# Altium PCB instaspin_bldc_driver.PcbDoc
Units mm, origin at the board's own origin, x right, y up, seen from the top; angles counter-clockwise.
Board outline 50 x 35 mm, 2 copper layers (Top Layer, Bottom Layer), stack 1.571 mm thick; 107 components, 89 nets, 367 pads, 311 vias.
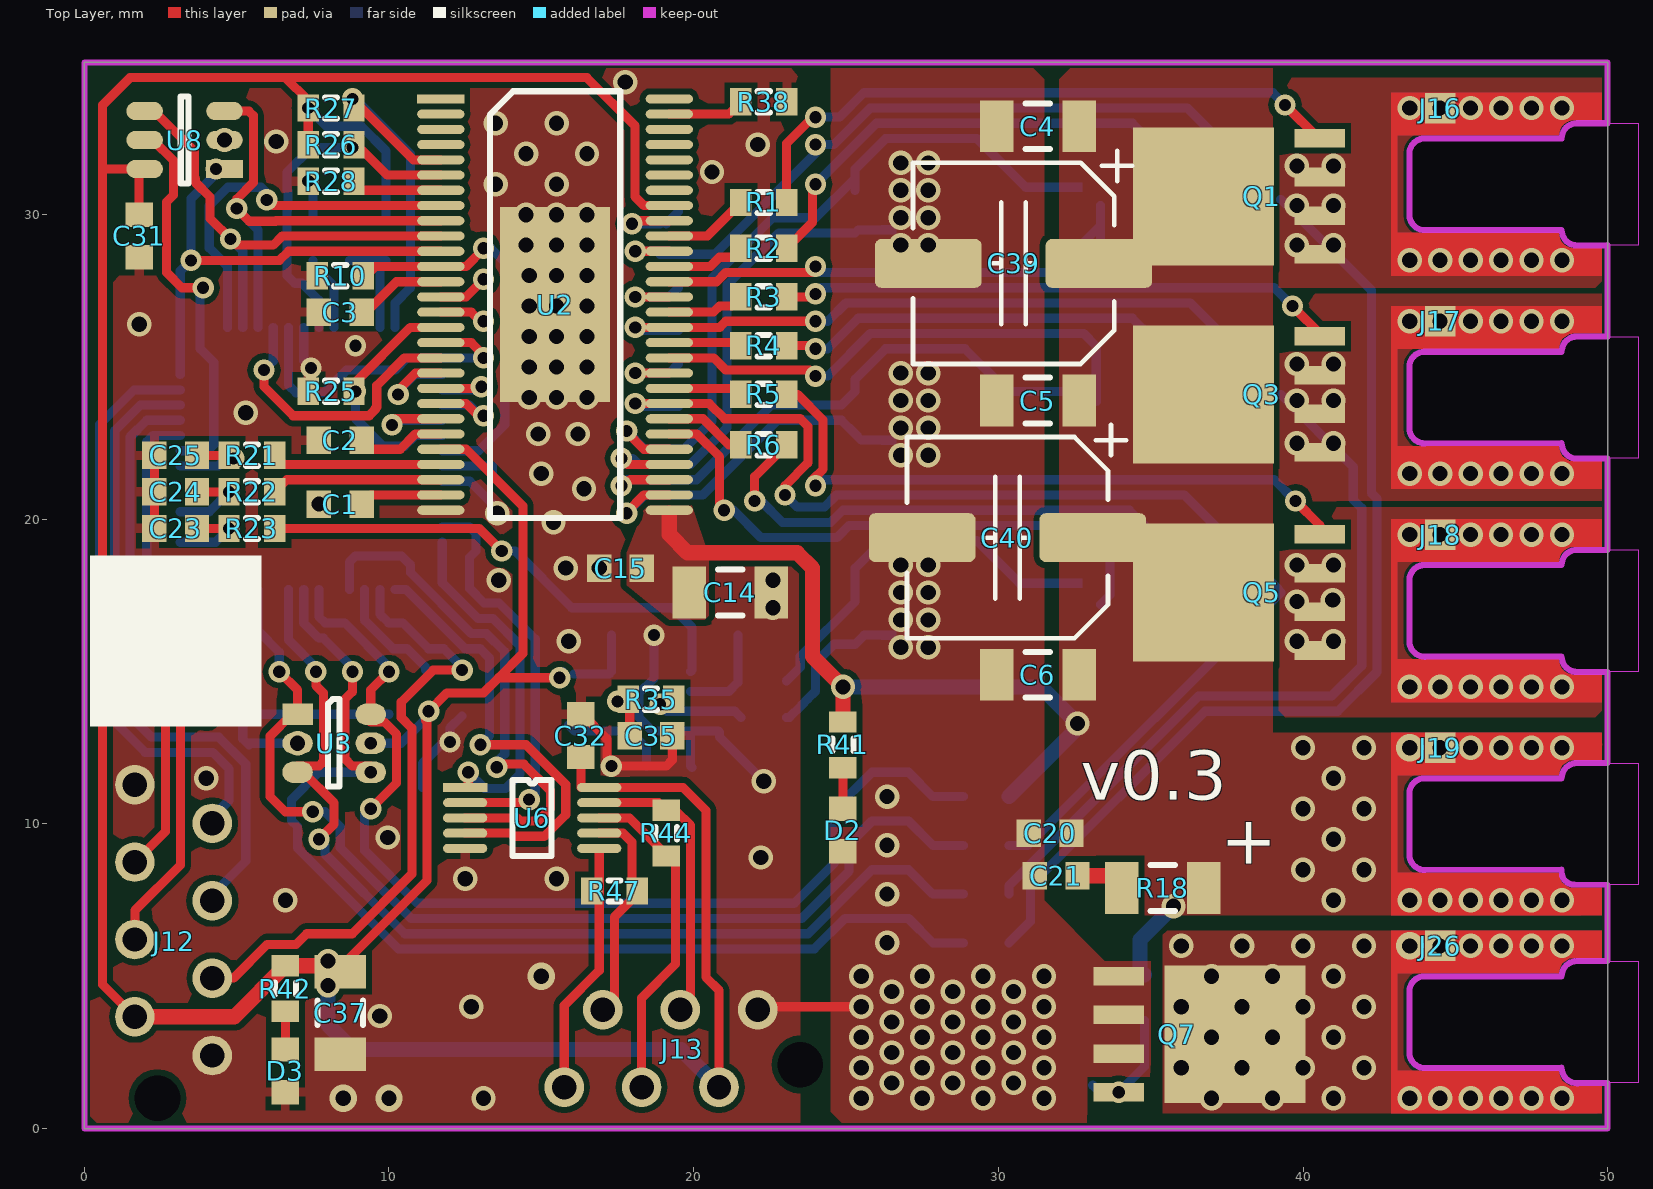
[diagram p0: Top Layer view]
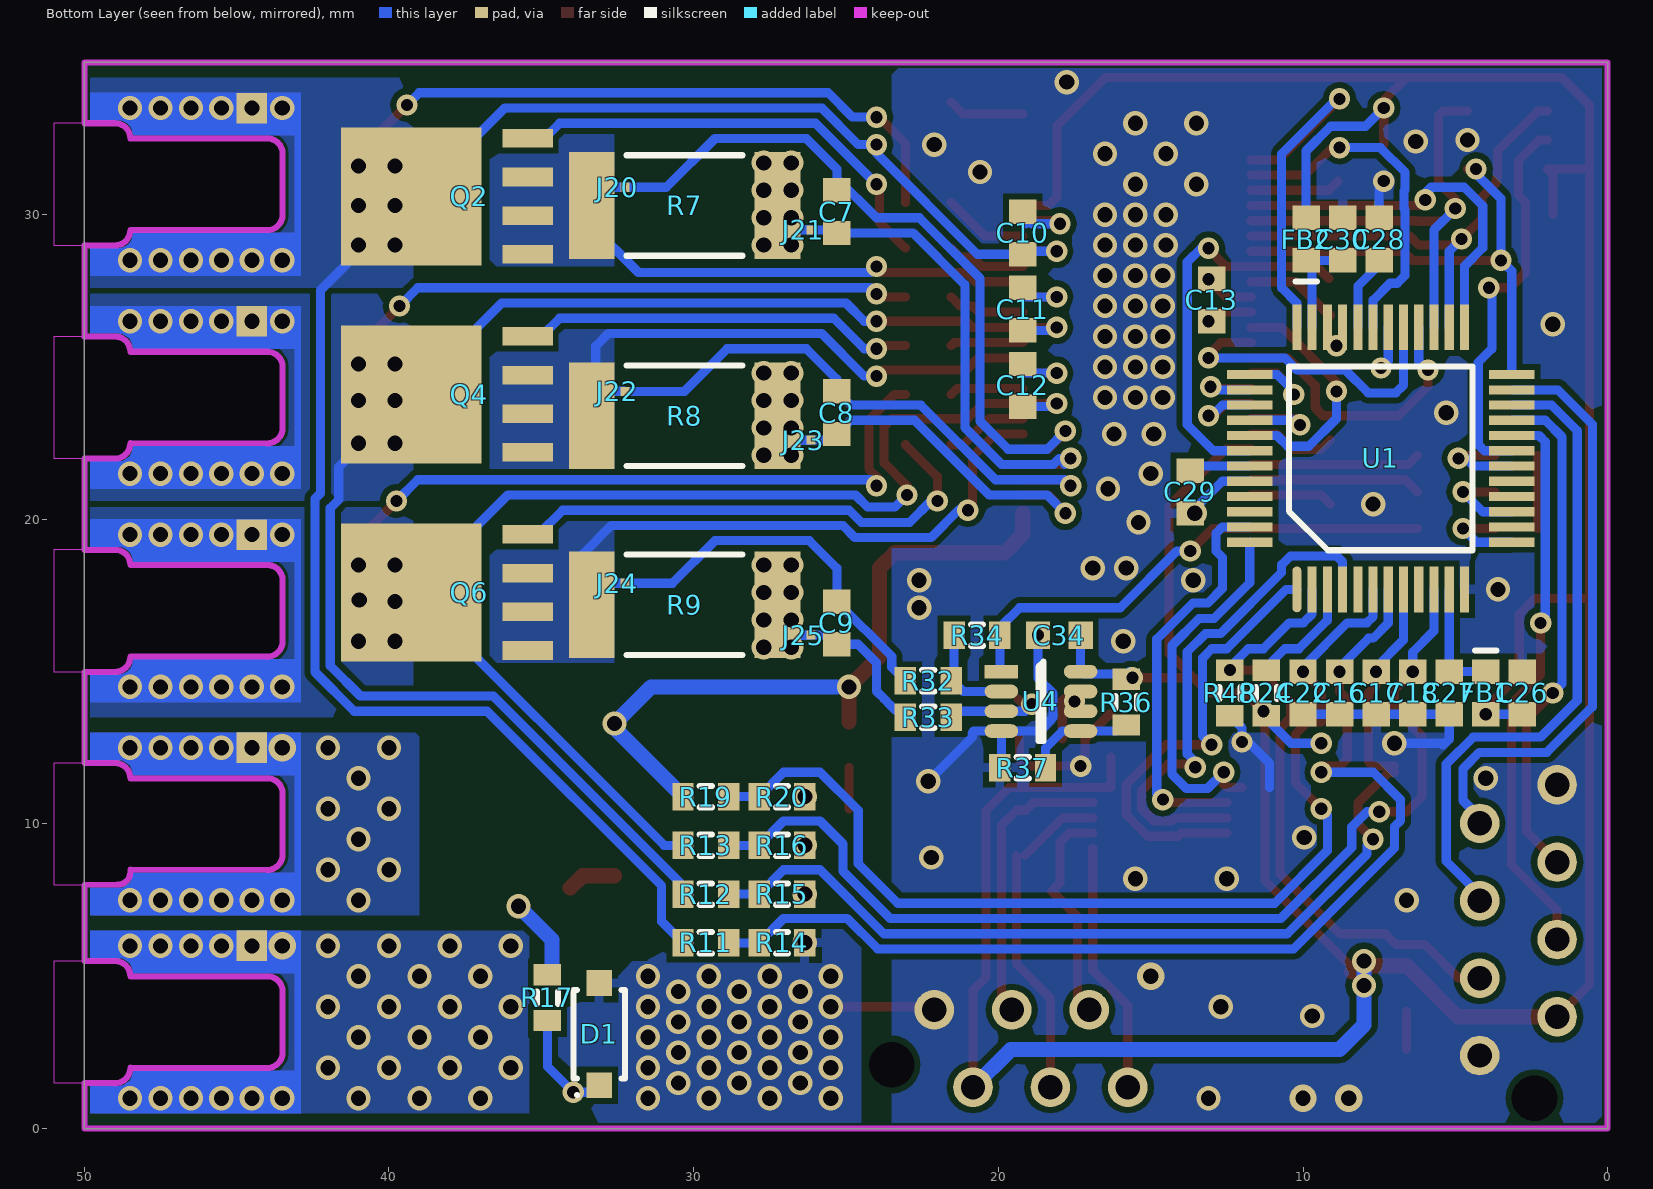
[diagram p1: Bottom Layer view, seen from below]

## Layer stack, top to bottom
Top Solder: solder mask 0.0102, Solder Resist, Dk 3.5
Top Layer: signal copper 0.0356
Dielectric 1: dielectric 1.5, FR-4, Dk 4.8
Bottom Layer: signal copper 0.0356
Bottom Solder: solder mask 0.0102, Solder Resist, Dk 3.5

## Board outline
0,0 50,0 50,35 0,35

## Design rules (kind name [scope] priority, off if disabled: settings)
Clearance ClearanceIgnore [HasFootprint('2MM-BANANA-SOCKET') vs OnLayer('Keep-Out Layer') OR HasFootprint('2MM-BANANA-SOCKET')] p1: gap=0
Clearance ClearanceKeepOut [All vs OnLayer('Keep-Out Layer')] p2: gap=0
Clearance [All] p3: gap=0.2
ComponentClearance ClearanceNone [HasFootprint('2MM-BANANA-SOCKET')] p1: gap=-1 collisioncheckmode=3 verticalgap=-1 showdistances=FALSE
ComponentClearance IgnoreClearance [InComponent('J15') vs OnLayer('Keep-Out Layer')] p2: gap=-1 collisioncheckmode=3 verticalgap=-1 showdistances=FALSE
ComponentClearance PowerPadClearance [HasFootprint('POWER-PAD')] p3: gap=0 collisioncheckmode=3 verticalgap=0 showdistances=FALSE
ComponentClearance NetTieClearance [HasFootprint('Net-Tie-0803')] p4: gap=0 collisioncheckmode=3 verticalgap=0 showdistances=FALSE
ComponentClearance [All] p5: gap=0.2 collisioncheckmode=3 verticalgap=0.2 showdistances=FALSE
DiffPairsRouting [All] p1: maxlimit=0.5 minlimit=0.2 mostfreqgap=0.2 toplayer_minwidth=0.2 toplayer_maxwidth=2 toplayer_prefwidth=0.3 bottomlayer_minwidth=0.2 bottomlayer_maxwidth=2 bottomlayer_prefwidth=0.3 maxuncoupledlength=10
MinimumSolderMaskSliver [All] p1: minsoldermaskwidth=0
PolygonConnect DirectConnectComponents [All vs IsVia or InComponent('U2') or InComponent('C37') or InComponent('C15') or InComponent('C14') or InComponent('J12') or InComponent('J13') or InComponent('Q7')] p1: connectstyle=Direct reliefconductorwidth=0.254 reliefentries=4 polygonreliefangle="90 Angle" airgapwidth=0.254
PolygonConnect DirectConnectPolygons [All vs IsNamedPolygon('Power 16V') or IsNamedPolygon('Power GND') or IsNamedPolygon('Driver 16V') or InNet('SL_A') or InNet('SL_B') or InNet('SL_C') or InNet('SH_A') or InNet('SH_B') or InNet('SH_C') or InNet('BAT_GND') or InNet('16V')] p2: connectstyle=Direct reliefconductorwidth=0.254 reliefentries=4 polygonreliefangle="90 Angle" airgapwidth=0.254
PolygonConnect [All] p3: connectstyle=Relief reliefconductorwidth=0.3 reliefentries=4 polygonreliefangle="90 Angle" airgapwidth=0.2
RoomDefinition instaspin_bldc_driver [InComponentClass('instaspin_bldc_driver')] p1: confinementstyle=ConfineIn formatcopy=TRUE lockcomponents=FALSE outline 0.012,-0.03 86.4,-0.03 86.4,50 0.012,50
RoutingVias [All] p1: holewidth=0.4 width=0.7 viastyle="Through Hole" minholewidth=0.3 minwidth=0.5 maxholewidth=5 maxwidth=3
ShortCircuit ShortCircuitAllow [HasFootprint('2MM-BANANA-SOCKET')] p1: allowed=TRUE
ShortCircuit [All] p2: allowed=FALSE
SilkToSilkClearance [All] p1: silktosilkclearance=0
SilkToSolderMaskClearance [IsPad] p1: minsilkscreentomaskgap=0 clearancetoexposedcopper=TRUE
SolderMaskExpansion SolderMaskExpansionTentedVia [IsVia And (Not IsTestpoint)] p1: expansion=-5
SolderMaskExpansion [All] p2: expansion=0.1
Width [All] p1: maxlimit=10 minlimit=0.2 preferedwidth=0.3
24 further rules are at their usual default settings.

## Classes and differential pairs
differential pair C_ISENSE: +C_ISENSE_P -C_ISENSE_N
differential pair B_ISENSE: +B_ISENSE_P -B_ISENSE_N
differential pair A_ISENSE: +A_ISENSE_P -A_ISENSE_N

## Components (designator, comment, footprint, x,y, rotation, side; value= is the part's Value field where it differs from the comment)
C1 "1uF" 1608[0603] 8.4,20.5 r0 top
C2 "1uF" 1608[0603] 8.4,22.6 r0 top
C3 "2.2uF" 1608[0603] 8.4,26.8 r0 top
C4 "2.2uF" C1206 31.3,32.9 r180 top
C5 "2.2uF" C1206 31.3,23.9 r180 top
C6 "2.2uF" C1206 31.3,14.9 r180 top
C7 "1nF" 1608[0603] 25.3,30.1 r90 bottom
C8 "1nF" 1608[0603] 25.3,23.5 r90 bottom
C9 "1nF" 1608[0603] 25.3,16.6 r90 bottom
C10 "100nF" 1608[0603] 19.2,29.4 r90 bottom
C11 "100nF" 1608[0603] 19.2,26.9 r90 bottom
C12 "100nF" 1608[0603] 19.2,24.4 r90 bottom
C13 "22nF" 1608[0603] 13,27.2 r270 bottom
C14 "2.2uF" C1206 21.2,17.6 r180 top
C15 "100nF" 1608[0603] 17.6,18.4 r180 top
C16 "100nF" 1608[0603] 8.8,14.3 r90 bottom
C17 "100nF" 1608[0603] 7.6,14.3 r90 bottom
C18 "100nF" 1608[0603] 6.4,14.3 r90 bottom
C20 "100nF" 1608[0603] 31.7,9.7 r0 top
C21 "10nF" 1608[0603] 31.9,8.3 r0 top
C22 "100nF" 1608[0603] 10,14.3 r90 bottom
C23 "2.2nF" 1608[0603] 3,19.7 r0 top
C24 "2.2nF" 1608[0603] 3,20.9 r0 top
C25 "2.2nF" 1608[0603] 3,22.1 r0 top
C26 "2.2uF" 1608[0603] 2.8,14.3 r270 bottom
C27 "2.2uF" 1608[0603] 5.2,14.3 r90 bottom
C28 "2.2uF" 1608[0603] 7.5,29.2 r270 bottom
C29 "2.2uF" 1608[0603] 13.7,20.9 r90 bottom
C30 "2.2uF" 1608[0603] 8.7,29.2 r270 bottom
C31 "100nF" 1608[0603] 1.8,29.3 r270 top
C32 "100nF" 1608[0603] 16.3,12.9 r90 top
C34 "100nF" 1608[0603] 18,16.2 r180 bottom
C35 "2.2uF" 1608[0603] 18.6,12.9 r180 top
C37 "10uF" C1206 8.4,3.8 r90 top
C39 "220µ" CAP_ELEC_6.3x4.2 30.5,28.4 r0 top
C40 "220µ" CAP_ELEC_6.3x4.2 30.3,19.4 r0 top
D1 "ZENER" SODFL370X135-2N 33.1,3.1 r90 bottom
D2 "LED1" 1608[0603] 24.9,9.8 r270 top
D3 "LED1" 1608[0603] 6.6,1.9 r270 top
FB1 "220 OHM" INDC1608L 4,14.3 r270 bottom
FB2 "60 OHM" INDC1608L 9.9,29.2 r90 bottom
J12 "JTAG" MICRO-MATCH-8 4.2,2.4 r270 top
J13 "RS485" MICRO-MATCH-6 22.1,3.9 r0 top
J16 "HEADER-1" 2MM-BANANA-SOCKET 50.5,31 r0 top
J17 "HEADER-1" 2MM-BANANA-SOCKET 50.5,24 r0 top
J18 "HEADER-1" 2MM-BANANA-SOCKET 50.5,17 r0 top
J19 "HEADER-1" 2MM-BANANA-SOCKET 50.5,10 r0 top
J20 "Net-Tie" NET-TIE-0803 32.5,30.9 r0 bottom net-tie
J21 "Net-Tie" NET-TIE-0803 26.4,29.5 r0 bottom net-tie
J22 "Net-Tie" NET-TIE-0803 32.5,24.2 r0 bottom net-tie
J23 "Net-Tie" NET-TIE-0803 26.4,22.6 r0 bottom net-tie
J24 "Net-Tie" NET-TIE-0803 32.5,17.9 r0 bottom net-tie
J25 "Net-Tie" NET-TIE-0803 26.4,16.2 r0 bottom net-tie
J26 "HEADER-1" 2MM-BANANA-SOCKET 50.5,3.5 r0 top
Q1 "MOSFET-N" SOT669 37.9,30.6 r180 top
Q2 "MOSFET-N" SOT669 38.1,30.6 r0 bottom
Q3 "MOSFET-N" SOT669 37.9,24.1 r180 top
Q4 "MOSFET-N" SOT669 38.1,24.1 r0 bottom
Q5 "MOSFET-N" SOT669 37.9,17.6 r180 top
Q6 "MOSFET-N" SOT669 38.1,17.6 r0 bottom
Q7 "MOSFET-N" SOT669 36.6,3.1 r0 top
R1 "10R" J1-0603 22.3,30.4 r0 top
R2 "10R" J1-0603 22.3,28.9 r0 top
R3 "10R" J1-0603 22.3,27.3 r0 top
R4 "10R" J1-0603 22.3,25.7 r0 top
R5 "10R" J1-0603 22.3,24.1 r0 top
R6 "10R" J1-0603 22.3,22.45 r0 top
R7 "10m" 2512M 30.3,30.3 r0 bottom
R8 "10m" 2512M 30.3,23.4 r0 bottom
R9 "10m" 2512M 30.3,17.2 r0 bottom
R10 "1k" J1-0603 8.4,28 r0 top
R11 "34.8k" J1-0603 29.6,6.1 r0 bottom
R12 "34.8k" J1-0603 29.6,7.7 r0 bottom
R13 "34.8k" J1-0603 29.6,9.3 r0 bottom
R14 "4.99k" J1-0603 27.1,6.1 r0 bottom
R15 "4.99k" J1-0603 27.1,7.7 r0 bottom
R16 "4.99k" J1-0603 27.1,9.3 r0 bottom
R17 "100k" J1-0603 34.8,4.3 r90 bottom
R18 "3.3R" C1206 35.4,7.9 r0 top
R19 "34.8k" J1-0603 29.6,10.9 r0 bottom
R20 "4.99k" J1-0603 27.1,10.9 r0 bottom
R21 "56R" J1-0603 5.5,22.1 r0 top
R22 "56R" J1-0603 5.5,20.9 r0 top
R23 "56R" J1-0603 5.5,19.7 r0 top
R24 "2.2k" J1-0603 11.2,14.3 r90 bottom
R25 "1k" J1-0603 8.1,24.2 r0 top
R26 "10k" J1-0603 8.1,32.3 r180 top
R27 "10k" J1-0603 8.1,33.5 r180 top
R28 "1R" J1-0603 8.1,31.1 r0 top
R32 "1.00k" J1-0603 22.3,14.7 r0 bottom
R33 "1.00k" J1-0603 22.3,13.5 r0 bottom
R34 "10.0k" J1-0603 20.7,16.2 r0 bottom
R35 "10k" J1-0603 18.6,14.1 r180 top
R36 "10.0k" J1-0603 15.8,14 r90 bottom
R37 "10.0k" J1-0603 19.2,11.85 r180 bottom
R38 "10k" J1-0603 22.3,33.7 r180 top
R41 "4.7k" J1-0603 24.9,12.6 r270 top
R42 "330R" J1-0603 6.6,4.6 r270 top
R44 "120R" J1-0603 19.1,9.7 r270 top
R47 "120R" J1-0603 17.4,7.8 r180 top
R48 "2.2k" J1-0603 12.4,14.3 r270 bottom
U1 "TMS320F28027F" PQFP48 10.2,17.7 r90 bottom
U2 "DRV8301" SO56_POWERPAD 11.7,33.8 r0 top
U3 "NUP4201MR6" TSOP-6 7,13.6 r0 top
U4 "OPA2374" SOT23-8 19.9,15 r180 bottom
U6 "SN65HVD73" SOP10 12.5,11.2 r0 top
U8 "25AA010" TSOT-23-6 4.6,31.5 r180 top

## Footprints (in the part's own frame and the unit in brackets; to place one, negate y for a bottom-side part, rotate by r counter-clockwise, add the part's x,y. Pads: shape width x height; smd on the part's side, far side on the other; paste and mask are expansions set on the pad)
2MM-BANANA-SOCKET [mm]
  rect 1x1 all layers, no hole: 1(-6,2.5)
  Keep-Out Layer board cut-out: 0.5,2 0.5,-2 -1.5,-2 -1.691,-1.962 -1.854,-1.854 -1.962,-1.691 -2,-1.5 -2,-1.5 -6.5,-1.5 -6.691,-1.462 -6.854,-1.354 -6.962,-1.191 -7,-1 -7,-1 -7,1 -6.962,1.191 -6.854,1.354 -6.691,1.462 -6.5,1.5 -6.5,1.5 -2,1.5 -1.962,1.691 -1.854,1.854 -1.691,1.962 -1.5,2 -1.5,2
  Multi-Layer region: -7,3 -7,1.7 -7.4,1.7 -7.4,-1.7 -7,-1.7 -7,-3 -7.6,-3 -7.6,3
  Multi-Layer region: -7.6,-1.6 -7.6,-3 -0.7,-3 -0.7,-2.1 -1.6,-2.1 -1.85,-2.033 -2.033,-1.85 -2.1,-1.6 -2.1,-1.6
  Multi-Layer region: -7.6,1.6 -7.6,3 -0.7,3 -0.7,2.1 -1.6,2.1 -1.85,2.033 -2.033,1.85 -2.1,1.6 -2.1,1.6
  body extent -6,-2 0,2, height 2
1608[0603] [mm] "Chip Capacitor, Body 1.6x0.8mm, IPC High Density"
  rect 0.8x0.9 smd: 1(-0.7,0) 2(0.7,0)
  body extent -0.87,-0.48 0.87,0.48, height 1.3
2512M [mm]
  rect 1.5x3.5 smd: 1(-3.05,0) 2(3.05,0)
  silkscreen extent -1.9,-1.65 1.9,1.65, body extent -3.22,-1.67 3.22,1.67, height 0.71
C1206 [mm] "Chip Capacitor, Body 3.2x1.6mm, IPC High Density"
  rect 1.1x1.7 smd: 1(-1.35,0) 2(1.35,0)
  silkscreen extent -0.4,-0.75 0.4,0.75, body extent -1.7,-0.9 1.7,0.9, height 1.3
CAP_ELEC_6.3x4.2 [mm] "Capacitor, polarized, aluminum can; 6.3x4.2mm DxH"
  round 0.508 on Mech15: 0(0,0)
  rrect25% 3.5x1.6 smd: 1(2.8,0) 2(-2.8,0)
  silkscreen extent -3.3,-3.3 3.9,3.7, body extent -3.3,-3.3 3.3,3.3, height 4.23
INDC1608L [mm] "Chip Inductor, Body 1.6x0.8mm, IPC High Density"
  rect 0.8x0.9 smd: 1(-0.7,0) 2(0.7,0)
  silkscreen extent -1.4,-0.35 -1.4,0.35, body extent -0.87,-0.48 0.87,0.48, height 0.55
J1-0603 [mm] "Chip Resistor, Body 1.6x0.8mm, IPC High Density"
  rect 0.7x0.9 smd: 1(-0.75,0) 2(0.75,0)
  silkscreen extent -0.2,-0.35 0.2,0.35, body extent -0.85,-0.48 0.85,0.48, height 0.9
MICRO-MATCH-6 [mm]
  round 1.3 hole 0.8: 1(0,0) 2(-1.27,-2.54) 3(-2.54,0) 4(-3.81,-2.54) 5(-5.08,0) 6(-6.35,-2.54)
  round 0 hole 1.5 unplated: drill(1.4,-1.8)
  body extent -7.95,-3.77 1.6,1.23, height 4
MICRO-MATCH-8 [mm]
  round 1.3 hole 0.8: 1(0,0) 2(-1.27,-2.54) 3(-2.54,0) 4(-3.81,-2.54) 5(-5.08,0) 6(-6.35,-2.54) 7(-7.62,0) 8(-8.89,-2.54)
  round 0 hole 1.5 unplated: drill(1.4,-1.8)
  body extent -10.49,-3.77 1.6,1.23, height 4
NET-TIE-0803 [mm]
  rect 0.3x0.3 smd paste-0.15 mask-0.15: 1(-0.25,0) 2(0.25,0)
  Top Layer region: -0.25,-0.15 -0.25,0.15 0.25,0.15 0.25,-0.15
PQFP48 [mm]
  oval 1.5x0.3 smd: 1(0,0)
  rect 1.5x0.3 smd: 2(0,-0.5) 3(0,-1) 4(0,-1.5) 5(0,-2) 6(0,-2.5) 7(0,-3) 8(0,-3.5) 9(0,-4) 10(0,-4.5) 11(0,-5) 12(0,-5.5) 25(8.6,-5.5) 26(8.6,-5) 27(8.6,-4.5) 28(8.6,-4) 29(8.6,-3.5) 30(8.6,-3) 31(8.6,-2.5) 32(8.6,-2) 33(8.6,-1.5) 34(8.6,-1) 35(8.6,-0.5) 36(8.6,0)
  rect 0.3x1.5 smd: 13(1.55,-7.05) 14(2.05,-7.05) 15(2.55,-7.05) 16(3.05,-7.05) 17(3.55,-7.05) 18(4.05,-7.05) 19(4.55,-7.05) 20(5.05,-7.05) 21(5.55,-7.05) 22(6.05,-7.05) 23(6.55,-7.05) 24(7.05,-7.05) 37(7.05,1.55) 38(6.55,1.55) 39(6.05,1.55) 40(5.55,1.55) 41(5.05,1.55) 42(4.55,1.55) 43(4.05,1.55) 44(3.55,1.55) 45(3.05,1.55) 46(2.55,1.55) 47(2.05,1.55) 48(1.55,1.55)
  silkscreen extent 1.28,-5.76 7.31,0.27, body extent -0.27,-7.33 8.87,1.82, height 1.62
SO56_POWERPAD [mm]
  rect 1.55x0.3 smd: 1(0,0)
  oval 1.55x0.3 smd: 2(0,-0.5) 3(0,-1) 4(0,-1.5) 5(0,-2) 6(0,-2.5) 7(0,-3) 8(0,-3.5) 9(0,-4) 10(0,-4.5) 11(0,-5) 12(0,-5.5) 13(0,-6) 14(0,-6.5) 15(0,-7) 16(0,-7.5) 17(0,-8) 18(0,-8.5) 19(0,-9) 20(0,-9.5) 21(0,-10) 22(0,-10.5) 23(0,-11) 24(0,-11.5) 25(0,-12) 26(0,-12.5) 27(0,-13) 28(0,-13.5) 29(7.5,-13.5) 30(7.5,-13) 31(7.5,-12.5) 32(7.5,-12) 33(7.5,-11.5) 34(7.5,-11) 35(7.5,-10.5) 36(7.5,-10) 37(7.5,-9.5) 38(7.5,-9) 39(7.5,-8.5) 40(7.5,-8) 41(7.5,-7.5) 42(7.5,-7) 43(7.5,-6.5) 44(7.5,-6) 45(7.5,-5.5) 46(7.5,-5) 47(7.5,-4.5) 48(7.5,-4) 49(7.5,-3.5) 50(7.5,-3) 51(7.5,-2.5) 52(7.5,-2) 53(7.5,-1.5) 54(7.5,-1) 55(7.5,-0.5) 56(7.5,0)
  rect 3.6x6.4 smd: 57(3.75,-6.75)
  silkscreen extent 1.61,-13.75 5.89,0.25
SODFL370X135-2N [mm] "SODFL, 2-Leads, Body 1,55x3,70mm, IPC Medium Density"
  rect 0.85x0.85 smd: 1(-1.675,0) 2(1.675,0)
  silkscreen extent -2.05,-0.85 1.45,0.85, body extent -1.43,-0.85 1.42,0.85, height 1.35
SOP10 [mm]
  rect 1.45x0.3 smd: 1(0,0)
  oval 1.45x0.3 smd: 2(0,-0.5) 3(0,-1) 4(0,-1.5) 5(0,-2) 6(4.4,-2) 7(4.4,-1.5) 8(4.4,-1) 9(4.4,-0.5) 10(4.4,0)
  silkscreen extent 1.56,-2.25 2.84,0.25, body extent -0.27,-2.5 4.63,0.5, height 1.15
SOT23-8 [mm]
  rect 1.1x0.45 smd: 1(0,0)
  oval 1.1x0.45 smd: 2(0,-0.65) 3(0,-1.3) 4(0,-1.95) 5(2.6,-1.95) 6(2.6,-1.3) 7(2.6,-0.65) 8(2.6,0)
  silkscreen extent 1.22,-2.28 1.38,0.33, body extent -0.08,-2.47 2.72,0.47, height 1.2
SOT669 [mil]
  rect 182x178 smd: D(46,0)
  rect 65x24 smd: G(-104.33,-75) S(-104.33,75) S(-104.33,-25) S(-104.33,25)
  body extent -125,-99 135,97, height 43
TSOP-6 [mm]
  rect 1x0.7 smd: 1(0,0)
  oval 1x0.7 smd: 2(0,-0.95) 3(0,-1.9) 4(2.4,-1.9) 5(2.4,-0.95) 6(2.4,0)
  silkscreen extent 1,-2.38 1.38,0.5, body extent -0.12,-2.45 2.58,0.55, height 1
TSOT-23-6 [mm]
  rect 1.2x0.6 smd: 1(0,0)
  oval 1.2x0.6 smd: 2(0,-0.95) 3(0,-1.9) 4(2.62,-1.9) 5(2.62,-0.95) 6(2.62,0)
  silkscreen extent 1.19,-2.38 1.43,0.48, body extent -0.07,-2.4 2.73,0.5, height 1.45

## Part data
C1 C2 C3 C4 C5 C6 C7 C8 C9 C10 C11 C12 C13 C14 C15 C16 C17 C18 C20 C21 C22 C23 C24 C25 C26 C27 C28 C29 C30 C31 C32 C34 C35 C37: library part "Cap Semi", "Capacitor (Semiconductor SIM Model)"
C39 C40: library part CAPE_470u_16V_THT, "Capacitor THT Alum Elec 470uF 20% 16V"
D1: library part ZENER-DIODE
D2 D3: "Typical RED GaAs LED"
FB1 FB2: library part Inductor, "Ferrite"
J12: library part HEADER-8
J13: library part HEADER-6
R1 R2 R3 R4 R5 R6 R7 R8 R9 R10 R11 R12 R13 R14 R15 R16 R17 R18 R19 R20 R21 R22 R23 R24 R25 R26 R27 R28 R32 R33 R34 R35 R36 R37 R38 R41 R42 R44 R47 R48: library part Res3, "Resistor"
U6: library part SN65HVD3086E
U8: "EEPROM"

## Via types
v1: diameter 0.8, hole 0.5, Top Layer to Bottom Layer, 228 vias
v2: diameter 0.7, hole 0.4, Top Layer to Bottom Layer, 76 vias
v3: diameter 0.9, hole 0.5, Top Layer to Bottom Layer, 7 vias

## Nets (pads, with @x,y where several pads share a name; then routed paths per layer and width w, separated by ;. In a path a pad name is that pad's centre, name@x,y a point inside that pad or via, vN(x,y) a via of type N, cw(c..) or ccw(c..) an arc to the next point about the centre after c; other vN are vias at no path point)
3.3V: C26.2 C31.1 C32.1 C34.2 C37.2 FB1.2 FB2.2 J12.2 J13.2 R24.1 R26.2 R27.2 R36.2 R42.1 U2.24 U2.49 U3.5 U4.8 U6.10 U8.6 | length 138.1
  Top Layer w0.3: 0.7,31.5 U8.6 1.8,31.32 C31.1 ; J12.2 0.6,4.73 0.6,17.4 ; v2(4,13.6) 4,13.807 2.9,14.907 2.9,16.89 2.39,17.4 0.6,17.4 ; R26.2 R27.2@7.35,33.3 ; R27.2@7.55,33.3 v2(7.35,33.5) 7.35,33.75 6.6,34.5 ; C37.2 8.4,5.3 11.25,8.15 11.25,13.354 11.2,13.404 v2@11.2,13.55 ; v2(11.3,13.7) 11.9,14.3 13.1,14.3 13.6,14.8 ; U2.24 12.532,22.3 14.4,20.432 14.4,15.6 13.6,14.8 ; v2(15.6,14.8) 13.6,14.8 ; C32.1 16.3,11.504 16.3,11.2 U6.10 17.9,11.2 19.645,11.2 20.4,10.445 20.4,4.974 20.83,4.544 J13.2 ; U2.49 18.368,30.3 18.268,30.4 18.075,30.593 18.075,32.92 16.495,34.5 6.6,34.5 ; 0.6,17.4 0.6,33.6 1.5,34.5 6.6,34.5
  Top Layer w0.5: J12.2 4.92,3.67 R42.1 8.2,5.35 C37.2 8.05,5.5 v1(8,5.5)
  Bottom Layer w0.3: C26.2 v2(4,13.6) ; v2(7.35,33.5) 7.95,32.9 8.5,32.9 8.505,32.895 8.51,32.9 9.09,32.9 9.9,32.09 FB2.2 ; v2(9.4,12.65) 10.395,12.65 11.3,13.555 v2(11.3,13.7) ; v2(15.6,14.8) 15.6,14.9 R36.2@15.7,15 ; R36.2@16.075,14.925 17.225,14.925 U4.8 C34.2
  Bottom Layer w0.5: v1(8,5.5) 8,3.4 8.8,2.6 19.59,2.6 J13.2
  other v1: 8,4.7
16V: C4.1 C5.1 C6.1 C14.2 C15.1 C20.2 C39.1 C40.1 J19.1 Q1.D Q3.D Q5.D R17.2 R18.2 R19.2 R41.1 U2.29 | length 25.2
  Top Layer w0.5: U2.29@19.2,20.2 19.2,19.5 19.8,18.9 23.4,18.9 23.9,18.4 23.9,15.5 v1(24.9,14.5) R41.1
  Bottom Layer w0.5: v1@25.3,14.5 31.4,14.5 v1(32.6,13.3) 32.6,13.15 R19.2 ; R17.2 34.65,5.2 34.65,6.2 v1(35.75,7.3)
  other v1: 41,7.5 43.5,7.5 44.5,7.5 45.5,7.5 46.5,7.5 47.5,7.5 48.5,7.5 40,8.5 42,8.5 41,9.5 40,10.5 42,10.5 41,11.5 40,12.5 42,12.5 45.5,12.5 46.5,12.5 47.5,12.5 48.5,12.5
  other v3: 43.5,12.5 44.5,12.5
A: J13.3 R44.1 U6.9 | length 9.5
  Top Layer w0.3: U6.9 18.85,10.7 R44.1 19.4,10.45 19.9,9.95 19.9,4.24 J13.3
A_ISENSE_N: C7.1 J21.1 U2.32 | length 16.5
  Top Layer w0.3: v2(17.627,22) 17.827,21.8 U2.32
  Bottom Layer w0.3: v2@17.827,21.8 v2(17.627,22) 17.993,22 18.193,21.8 19.886,21.8 21.1,23.014 21.1,27.7 22.8,29.4 C7.1 25.4,29.5 J21.1
A_ISENSE_P: C7.2 J20.1 U2.33 | length 24.6
  Top Layer w0.3: v2(17.8,22.9) 17.8,22.868 18.368,22.3 U2.33
  Bottom Layer w0.3: v2(17.8,22.9) 18.4,22.3 19.679,22.3 20.6,23.221 20.6,27.907 22.593,29.9 24,29.9 C7.2@25.3,31.2 ; C7.2 25.3,31.5 26.3,32.5 29.3,32.5 30.9,30.9 J20.1
ADCINB1: C23.2 R23.1 U1.13 | length 2.8
  Top Layer w0.3: C23.2 v2(4.75,19.7)
  Bottom Layer w0.3: U1.13 4.3,19.25 v2(4.75,19.7)
ADCINB3: C24.2 R22.1 U1.15 | length 2.9
  Top Layer w0.3: C24.2 v2(4.75,20.9)
  Bottom Layer w0.3: U1.15 4.1,20.25 v2(4.75,20.9)
ADCINB7: C25.2 R21.1 U1.18 | length 2.9
  Top Layer w0.3: C25.2 R21.1
  Bottom Layer w0.3: U1.18 4.4,21.75 4.65,22 v2(4.9,22)
B: J13.4 R44.2 U6.8 | length 10.8
  Top Layer w0.3: U6.8 17.889,10.2 R44.2@19.12,8.97 ; J13.4 18.29,4.29 19.4,5.4 R44.2@19.4,8.95
B_ISENSE_N: C8.1 J23.1 U2.30 | length 11.5
  Top Layer w0.3: v2(17.8,20.2) 17.8,20.232 18.368,20.8 U2.30
  Bottom Layer w0.3: v2(17.8,20.2) 18.4,20.8 20.3,20.8 22.75,23.25 24.85,23.25 C8.1 25.5,22.6 J23.1
B_ISENSE_P: C8.2 J22.1 U2.31 | length 18.6
  Top Layer w0.3: 17.917,21.3 U2.31
  Bottom Layer w0.3: v2(17.627,21.1) 17.827,21.3 20.093,21.3 22.543,23.75 24.85,23.75 C8.2 25.3,24.6 26.3,25.6 28.9,25.6 30.3,24.2 J22.1
BAT_GND: J26.1 Q7.D
  other v1: 37,1 39,1 41,1 43.5,1 44.5,1 45.5,1 46.5,1 47.5,1 48.5,1 36,2 38,2 40,2 42,2 37,3 39,3 41,3 36,4 38,4 40,4 42,4 37,5 39,5 41,5 36,6 38,6 40,6 42,6 45.5,6 46.5,6 47.5,6 48.5,6
  other v3: 43.5,6 44.5,6
C_ISENSE_N: C9.1 J25.1 R33.2 | length 4.8
  Bottom Layer w0.3: R33.2 23.143,13.5 23.543,13.9 23.545,13.9 23.75,14.105 23.75,14.107 24,14.357 24,15.293 24.607,15.9 C9.1 25.6,16.2 J25.1
C_ISENSE_P: C9.2 J24.1 R32.2 | length 12.5
  Bottom Layer w0.3: R32.2 23.5,15.15 23.5,15.5 C9.2 25.3,18.4 26.2,19.3 29.3,19.3 30.7,17.9 J24.1
DC_CAL: R10.2 U1.42 U2.12 | length 13
  Top Layer w0.3: R10.2@9.15,27.9 9.55,28.3 U2.12 12.532,28.3 13.1,28.868 v2(13.1,28.9)
  Bottom Layer w0.3: U1.42 12.94,22.25 13.8,23.11 13.8,23.4 13.8,28.445 13.345,28.9 v2(13.1,28.9)
DC_V_FB: C22.2 R19.1 R20.2 U1.6 U3.6 | length 34.5
  Top Layer w0.3: v2(9.4,10.5) 10.25,11.35 10.25,12.94 9.84,13.35 9.4,13.35 U3.6 ; U3.6@9.4,13.8 9.4,14.4 v2(10,15)
  Bottom Layer w0.3: U1.6 7.7,16.805 7.905,16.6 8.545,16.6 10,15.145 v2(10,15) ; v2(9.4,10.5) 9.2,10.3 9.2,9.131 10.931,7.4 23.3,7.4 24.6,8.7 24.6,10.445 25.855,11.7 27.05,11.7 R20.2 R19.1
DE: U1.4 U6.3 | length 17
  Top Layer w0.3: U6.3 14.207,10.2 14.307,10.1 14.89,10.1 15.3,10.51 15.3,11.09 14.426,11.964 v2@13.536,11.964
  Bottom Layer w0.3: U1.4 8.7,18.6 8.9,18.8 10.407,18.8 10.7,18.507 10.7,18.259 12.709,16.25 13.202,16.25 13.8,15.652 13.8,12.3 13.536,12.036 v2@13.536,11.964
  other v2: 13.536,11.864
EN_GATE: R25.2 U1.41 U2.16 | length 8.1
  Top Layer w0.3: v2(8.9,24.2) 8.9,24.5 10.7,26.3 U2.16
  Bottom Layer w0.3: v2(8.9,24.2) 8.9,23.31 9.81,22.4 10.505,22.4 10.855,22.75 U1.41
FAULT: R26.1 U1.31 U2.6 | length 11.6
  Top Layer w0.3: v2(8.8,32.2) 8.8,32.155 8.945,32.3 9.945,31.3 U2.6
  Bottom Layer w0.3: U1.31 7.7,27.195 7.145,27.75 6.905,27.75 6.65,28.005 6.65,30.16 6.685,30.195 6.685,30.775 6.65,30.81 6.65,31.39 7.46,32.2 v2(8.8,32.2)
GH_A: R1.1 U2.47 | length 2.8
  Top Layer w0.3: U2.47 20.45,29.3 R1.1
GH_B: R3.1 U2.42 | length 2.6
  Top Layer w0.3: U2.42 20.648,26.8 20.848,27 21.25,27 R3.1
GH_C: R5.1 U2.37 | length 2.4
  Top Layer w0.3: U2.37 21.35,24.3 R5.1
GL_A: R2.1 U2.45 | length 2.6
  Top Layer w0.3: U2.45 20.548,28.3 20.848,28.6 21.25,28.6 R2.1
GL_B: R4.1 U2.40 | length 2.4
  Top Layer w0.3: U2.40 21.45,25.8 R4.1
GL_C: R6.1 U2.35 | length 2.7
  Top Layer w0.3: U2.35 20.307,23.3 21.157,22.45 R6.1
GND: C1.1 C2.1 C3.1 C4.2 C5.2 C6.2 C14.1 C15.2 C16.1 C17.1 C18.1 C20.1 C21.1 C22.1 C23.1 C24.1 C25.1 C26.1 C27.1 C28.1 C29.1 C30.1 C31.2 C32.2 C34.1 C35.1 C37.1 C39.2 C40.2 D1.2 D2.2 D3.2 J12.1 J12.8 J13.1 J21.2 J23.2 J25.2 Q7.S R7.1 R8.1 R9.1 R10.1 R14.1 R15.1 R16.1 R20.1 R25.1 R28.1 R37.1 R38.1 R48.2 U1.12 U1.30 U1.33 U1.34 U1.44 U2.28 U2.57 U3.2 U4.4 U6.5 U8.2 | length 35.4
  Top Layer w0.3: C23.1 C24.1 C25.1 ; C32.2 16.35,13.6 17.15,12.8 17.15,12.205 17.455,11.9 19.1,11.9 19.3,12.1 C35.1@19.3,12.8 ; J13.1 22.3,4.1 22.4,4 v1(25.5,4)
  Bottom Layer w0.3: v1(7,12.65) 5.45,12.65 5.4,12.6 5.2,12.8 C27.1 C18.1 C17.1 C16.1 C22.1 ; U1.30 7.2,25.211 v2(7.442,24.969) ; v2(7.35,31.1) 7.5,30.95 C28.1 ; 11.1,11.2 11.1,11.99 12,12.89 12,13.15 R48.2 ; U1.44 12.65,21.25 C29.1 ; v2(18.7,16.2) 18.7,14.79 18.2,14.29 18.2,13.5 18.65,13.05 U4.4 ; R37.1 19.9,11.9 U4.4 ; v1(22.3,11.4) 20.85,12.85 20.85,13.008 20.808,13.05 U4.4
  other v1: 13.1,1 25.5,1 27.5,1 29.5,1 31.5,1 26.5,1.5 28.5,1.5 30.5,1.5 25.5,2 27.5,2 29.5,2 31.5,2 26.5,2.5 28.5,2.5 30.5,2.5 25.5,3 27.5,3 29.5,3 31.5,3 26.5,3.5 28.5,3.5 30.5,3.5 9.7,3.7 12.7,4 27.5,4 29.5,4 31.5,4 26.5,4.5 28.5,4.5 30.5,4.5 25.5,5 27.5,5 29.5,5 31.5,5 26.35,6.1 6.6,7.5 26.35,7.7 12.5,8.2 15.5,8.2 22.2,8.9 26.35,9.3 9.957,9.555 26.35,10.9 4,11.5 26.8,15.8 27.7,15.8 15.9,16 26.8,16.7 27.7,16.7 22.6,17.1 26.8,17.6 27.7,17.6 3.6,17.7 13.6,18 22.6,18 15.8,18.4 16.9,18.4 26.8,18.5 27.7,18.5 15.4,19.9 13.55,20.2 7.7,20.5 16.4,21 15,21.5 26.8,22.1 27.7,22.1 14.9,22.8 16.2,22.8 26.8,23 27.7,23 5.3,23.5 26.8,23.9 27.7,23.9 14.6,24 15.5,24 16.5,24 26.8,24.8 27.7,24.8 14.6,25 15.5,25 16.5,25 14.6,26 15.5,26 16.5,26 1.8,26.4 14.6,27 15.5,27 16.5,27 14.6,28 15.5,28 16.5,28 14.5,29 15.5,29 16.5,29 26.8,29 27.7,29 26.8,29.9 27.7,29.9 14.5,30 15.5,30 16.5,30 26.8,30.8 27.7,30.8 13.5,31 15.5,31 20.6,31.4 26.8,31.7 27.7,31.7 14.5,32 16.5,32 22.1,32.3 6.3,32.4 4.6,32.45 13.5,33 15.5,33 17.755,34.35
  other v2: 17.3,11.9 12,12.69 8.9,25.7
  other v3: 8.5,1 10,1 15,5
IA_FB: R21.2 U2.25 | length 5.6
  Top Layer w0.3: R21.2 6.55,21.8 9.645,21.8 U2.25
IB_FB: R22.2 U2.26 | length 5.6
  Top Layer w0.3: R22.2 6.65,21.3 7.8,21.3 9.852,21.3 U2.26
IC_FB: R23.2 R34.1 U4.1 | length 16.5
  Top Layer w0.3: R23.2 12.961,19.7 v2(13.7,18.961)
  Bottom Layer w0.3: v2(13.7,18.961) 14.139,18.961 16,17.1 19.3,17.1 19.95,16.45 19.95,15.05 U4.1
NetC1_2: C1.2 U2.27 | length 2.7
  Top Layer w0.3: C1.2 9.4,20.8 10.059,20.8 U2.27
NetC2_2: C2.2 U2.23 | length 2.9
  Top Layer w0.3: C2.2 9.4,22.3 10.368,22.3 10.868,22.8 U2.23
NetC3_2: C3.2 U2.13 | length 3.1
  Top Layer w0.3: C3.2@9.1,26.7 9.145,26.7 10.245,27.8 U2.13
NetC10_2: C10.2 U2.48 | length 3
  Top Layer w0.3: v2(17.978,29.7) 18.078,29.8 U2.48
  Bottom Layer w0.3: v2(17.978,29.7) 18.9,29.7 19,29.8 19.1,29.7 C10.2@19.5,30.1
NetC11_2: C11.2 U2.43 | length 2.7
  Top Layer w0.3: v2(18.085,27.3) U2.43
  Bottom Layer w0.3: v2(18.085,27.3) 19.2,27.3 C11.2@19.5,27.6
NetC12_2: C12.2 U2.38 | length 2.7
  Top Layer w0.3: v2(18.085,24.8) U2.38
  Bottom Layer w0.3: v2(18.085,24.8) 19.2,24.8 C12.2@19.5,25.1
NetC13_1: C13.1 U2.14 | length 1.6
  Top Layer w0.3: U2.14 12.532,27.3 13.1,27.868 v2(13.1,27.878)
NetC13_2: C13.2 U2.15 | length 1.5
  Top Layer w0.3: U2.15 12.7,26.8 13,26.5 v2(13.1,26.5)
NetC21_2: C21.2 R18.1 | length 1.6
  Top Layer w0.5: C21.2 33.65,8.3 R18.1
NetC27_2: C27.2 FB1.1 U1.11 | length 3.9
  Bottom Layer w0.3: FB1.1 C27.2 5.2,16.805 U1.11
NetC28_2: C28.2 U1.32 | length 2.5
  Bottom Layer w0.3: C28.2 7.5,28.355 8.2,27.655 U1.32
NetC29_2: C29.2 U1.43 | length 2
  Bottom Layer w0.3: U1.43 13.4,21.75 C29.2@13.4,21.4
NetC30_2: C30.2 FB2.1 U1.35 | length 3.5
  Bottom Layer w0.3: C30.2 FB2.1 9.7,28.3 U1.35
NetC35_2: C35.2 R35.2 U4.6 U4.7 | length 1.9
  Top Layer w0.3: v2@17.3,14.025 17.375,14.1 R35.2 17.9,14.05 C35.2@17.9,12.8
  other v2: 17.5,14.025
NetD1_1: D1.1 Q7.G R17.1 | length 3.7
  Bottom Layer w0.3: D1.1 33.33,1.195 v2(33.95,1.195) 34.8,2.045 R17.1
NetD2_1: D2.1 R41.2 | length 1.3
  Top Layer w0.3: D2.1 R41.2
NetD3_1: D3.1 R42.2 | length 1.3
  Top Layer w0.3: D3.1 R42.2
NetQ1_G: Q1.G R1.2 | length 20.7
  Top Layer w0.3: R1.2 23.05,32.34 23.91,33.2 v2(24,33.2) ; v2(39.41,33.6) Q1.G@40.527,32.483
  Bottom Layer w0.3: v2(24,33.2) 24.786,33.2 25.586,34 39.01,34 v2(39.41,33.6)
NetQ2_G: Q2.G R2.2 | length 14.9
  Top Layer w0.3: R2.2 23.9,29.75 23.9,30.9 v2(24,31)
  Bottom Layer w0.3: v2(24,31) 26,33 34.4,33 34.895,32.505 Q2.G@35.35,32.505
NetQ3_G: Q3.G R3.2 | length 18.3
  Top Layer w0.3: R3.2 v2@24,27.3 ; v2(39.655,27) Q3.G@40.65,26.005
  Bottom Layer w0.3: v2(24,27.4) 24.2,27.6 39.055,27.6 v2(39.655,27)
NetQ4_G: Q4.G R4.2 | length 13.1
  Top Layer w0.3: R4.2 23.9,25.7 v2(24,25.6)
  Bottom Layer w0.3: v2(24,25.6) 24.4,25.6 25.4,26.6 34.4,26.6 34.995,26.005 Q4.G
NetQ5_G: Q5.G R5.2 | length 21.4
  Top Layer w0.3: R5.2 23.407,24.1 24.25,23.257 24.25,21.648 23.902,21.3 24,21.202 v2(24,21.1) ; v2(39.755,20.6) 40.55,19.805 Q5.G
  Bottom Layer w0.3: v2(24,21.1) 24.2,21.3 39.055,21.3 v2(39.755,20.6)
NetQ6_G: Q6.G R6.2 | length 16.6
  Top Layer w0.3: v2(22,20.6) 22,21.4 R6.2
  Bottom Layer w0.3: v2(22,20.6) 22.21,20.6 22.91,19.9 24.497,19.9 24.897,20.3 34.3,20.3 35.095,19.505 Q6.G@35.55,19.505
NetR28_2: R28.2 U2.7 | length 3
  Top Layer w0.3: R28.2 9.15,30.8 U2.7
NetR32_1: R32.1 R34.2 U4.2 | length 3.2
  Bottom Layer w0.3: U4.2 21.15,14.35 21.45,14.65 R34.2
NetR33_1: R33.1 R35.1 U4.3 | length 3.2
  Top Layer w0.3: v2@18.964,13.864 19.114,13.864 R35.1
  Bottom Layer w0.3: v2@18.964,13.864 19.129,13.7 U4.3 21.35,13.7 R33.1
  other v2: 18.9,13.929
NetR36_1: R36.1 R37.2 U4.5 | length 3.5
  Bottom Layer w0.3: R36.1@15.9,13.25 16.1,13.05 U4.5 17.9,13.05 18.45,12.5 R37.2@18.45,11.9
NetR38_2: R38.2 U2.55 | length 2.5
  Top Layer w0.3: U2.55 21.15,33.3 R38.2
OCTW: R27.1 U1.36 U2.5 | length 12.3
  Top Layer w0.3: v2(8.8,33.8) 10.8,31.8 U2.5
  Bottom Layer w0.3: v2(8.8,33.8) 8.897,33.8 10.7,31.997 10.7,27.6 10.2,27.1 U1.36
PWM_AH: U1.29 U2.17 | length 10.5
  Top Layer w0.3: U2.17 12.7,25.8 13.1,25.4 v2(13.1,25.3)
  Bottom Layer w0.3: U1.29 6.7,24.4 6.95,24.15 7.86,24.15 8.61,24.9 10.2,24.9 10.6,25.3 v2(13.1,25.3)
PWM_AL: U1.28 U2.18 | length 9.7
  Top Layer w0.3: v2(5.9,24.9) 5.9,24.355 6.855,23.4 9.354,23.4 9.354,23.409 9.55,23.605 9.55,23.632 9.6,23.682 9.6,24.1 ; 9.6,23.891 9.6,24.39 10.51,25.3 U2.18
  Bottom Layer w0.3: v2(5.9,24.9) 6.2,25.2 U1.28
PWM_BH: U1.37 U2.19 | length 3.5
  Top Layer w0.3: v2(10.3,24.1) 10.3,24.232 10.868,24.8 U2.19
  Bottom Layer w0.3: v2(10.3,24.1) 10.3,24.2 10.85,24.75 U1.37
PWM_BL: U1.38 U2.20 | length 2.7
  Top Layer w0.3: U2.20 12.978,24.3 v2(13.031,24.354)
  Bottom Layer w0.3: U1.38 12.928,24.25 v2(13.031,24.354)
PWM_CH: U1.39 U2.21 | length 3.1
  Top Layer w0.3: U2.21 12.532,23.8 12.932,23.4 v2(13.1,23.4)
  Bottom Layer w0.3: U1.39 12.645,23.75 12.995,23.4 v2(13.1,23.4)
PWM_CL: U1.40 U2.22 | length 3.5
  Top Layer w0.3: v2(10.1,23.1) 10.1,23.192 10.208,23.3 U2.22
  Bottom Layer w0.3: v2(10.1,23.1) 10.1,23.192 10.158,23.25 U1.40
RE: U1.47 U6.2 | length 13.4
  Top Layer w0.3: U6.2 14.5,10.7 v2(14.6,10.8)
  Bottom Layer w0.3: U1.47 12.645,19.75 12.85,19.545 12.85,18.955 12.645,18.75 12.645,17.728 13.123,17.25 13.616,17.25 14.8,16.066 14.8,11 v2(14.6,10.8)
RESET: R24.2 U1.3 | length 3.7
  Bottom Layer w0.3: U1.3 9.2,16.686 10.136,15.75 10.595,15.75 11.2,15.145 R24.2
RX: U1.48 U6.1 | length 12.1
  Top Layer w0.3: U6.1@12,11.2 U6.1 12.6,11.3 v2(12.6,11.7)
  Bottom Layer w0.3: U1.48 11.75,17.916 12.916,16.75 13.409,16.75 14.3,15.859 14.3,11.637 13.826,11.164 13.136,11.164 v2(12.6,11.7)
SCLK: U1.24 U2.11 U8.1 | length 16
  Top Layer w0.3: v2@3.4,28.6 v2(3.5,28.5) 6.404,28.5 6.704,28.8 U2.11 ; v2(4.32,31.5) U8.1
  Bottom Layer w0.3: U1.24 3.15,28.15 v2(3.5,28.5) 3.5,30.525 4.32,31.345 v2(4.32,31.5)
SCS: U1.25 U2.8 | length 12.5
  Top Layer w0.3: v2@5.99,30.5 6.19,30.3 U2.8
  Bottom Layer w0.3: U1.25 4.7,28.31 4.1,28.91 4.1,30.29 4.71,30.9 5.8,30.9 5.985,30.715 v2(5.985,30.485)
SCS2: U1.19 U8.5 | length 13
  Top Layer w0.3: U8.5 2.249,32.45 2.93,31.769 2.93,30.65 2.7,30.42 2.7,28.1 3.2,27.6 v2(3.9,27.6)
  Bottom Layer w0.3: U1.19 4.045,22.25 4.25,22.455 4.25,25.15 3.8,25.6 3.8,27.5 v2(3.9,27.6)
SDI: U1.27 U2.9 U8.3 | length 15.4
  Top Layer w0.3: U8.3 5.4,33.4 5.55,33.25 5.55,31.055 5,30.505 v2(5,30.2) 5.415,29.785 6.275,29.785 6.29,29.8 U2.9
  Bottom Layer w0.3: v2(5,30.2) 5.7,29.5 U1.27
SDO: U1.26 U2.10 U8.4 | length 15.7
  Top Layer w0.3: U8.4 2.3,33.4 3.62,32.08 3.62,31.21 3.65,31.18 3.65,31.055 4.13,30.575 4.13,29.87 v2(4.8,29.2) 5,29 6.197,29 6.497,29.3 U2.10
  Bottom Layer w0.3: v2(4.8,29.2) 5.2,28.8 U1.26
SH_A: C10.1 J16.1 Q1.S Q2.D R11.2 U2.46 | length 57.4
  Top Layer w0.3: v2(18.085,28.8) U2.46
  Bottom Layer w0.3: v2(18.085,28.8) C10.1@19.2,28.8 ; C10.1@18.9,28.7 20.686,28.7 24,32.014 v2(24,32.3) 24.593,32.3 25.793,33.5 36.2,33.5 Q2.D@37.9,31.8 ; R11.2 31.05,6.8 31.05,7.967 36.783,13.7 41.142,13.7 42.43,14.987 42.43,20.675 42.25,20.855 42.25,27.518 Q2.D@39.268,30.5
  other v1: 43.5,28.5 44.5,28.5 45.5,28.5 46.5,28.5 47.5,28.5 48.5,28.5 39.8,29 41,29 39.8,30.3 41,30.3 39.8,31.6 41,31.6 43.5,33.5 44.5,33.5 45.5,33.5 46.5,33.5 47.5,33.5 48.5,33.5
SH_B: C11.1 J17.1 Q3.S Q4.D R12.2 U2.41 | length 48.3
  Top Layer w0.3: v2(18.085,26.3) U2.41 20.855,26.3 21.055,26.5 23.9,26.5 v2@24,26.4
  Bottom Layer w0.3: v2(18.085,26.3) 18.185,26.2 C11.1 C11.1@19.5,26.2 ; v2(24,26.5) 24.4,26.5 25,27.1 36.3,27.1 Q4.D@38.7,24.7 ; R12.2 30.35,7.975 36.575,14.2 40.935,14.2 41.93,15.194 41.93,20.368 41.65,20.648 41.65,21.718 Q4.D
  other v1: 43.5,21.5 44.5,21.5 45.5,21.5 46.5,21.5 47.5,21.5 48.5,21.5 39.8,22.5 41,22.5 39.8,23.9 41,23.9 39.8,25.1 41,25.1 43.5,26.5 44.5,26.5 45.5,26.5 46.5,26.5 47.5,26.5 48.5,26.5
SH_C: C12.1 J18.1 Q5.S Q6.D R13.2 U2.36 | length 40.2
  Top Layer w0.3: v2(18.085,23.8) U2.36 20.514,23.8 21.014,23.3 23.5,23.3 23.75,23.05 23.75,21.855 23,21.105 v2(23,20.8)
  Bottom Layer w0.3: v2(18.085,23.8) 18.185,23.7 C12.1 C12.1@19.5,23.7 ; v2(23,20.8) 23.4,20.4 24.29,20.4 24.69,20.8 36.1,20.8 Q6.D@39.2,17.7 ; R13.2 30.968,9.3 Q6.D
  other v1: 43.5,14.5 44.5,14.5 45.5,14.5 46.5,14.5 47.5,14.5 48.5,14.5 39.8,16 41,16 39.8,17.3 40.975,17.35 39.8,18.5 41,18.5 43.5,19.5 44.5,19.5 45.5,19.5 46.5,19.5 47.5,19.5 48.5,19.5
SL_A: J20.2 Q2.S R7.2 U2.44 | length 16.1
  Top Layer w0.3: U2.44 20.755,27.8 21.055,28.1 22.045,28.1 23.9,28.1 v2@24,28.2
  Bottom Layer w0.3: v2(24,28.3) 24.2,28.1 31.81,28.1 R7.2@33.35,29.64 ; R7.2@33.35,29.24 R7.2
SL_B: J22.2 Q4.S R8.2 U2.39 | length 16.8
  Top Layer w0.3: U2.39 20.655,25.3 21.055,24.9 23.8,24.9 v2(24,24.7)
  Bottom Layer w0.3: v2(24,24.7) 24.4,24.7 25.8,26.1 32.8,26.1 33.214,25.686 R8.2@33.214,23.864
SL_C: J24.2 Q6.S R9.2 U2.34 | length 19.1
  Top Layer w0.3: U2.34 20.1,22.8 20.85,22.05 20.85,20.45 v2(21,20.3)
  Bottom Layer w0.3: v2(21,20.3) 21.31,20.3 22.21,19.4 24.704,19.4 25.104,19.8 32.7,19.8 33.662,18.838 33.662,17.512 R9.2
TCK: J12.7 U1.23 | length 19.3
  Bottom Layer w0.3: U1.23 1.634,24.25 0.5,23.116 0.5,13.848 1.998,12.35 4.211,12.35 4.75,11.811 4.75,10.77 J12.7@4.2,10.22
TDI: J12.4 U1.20 | length 18.6
  Top Layer w0.3: J12.4 1.66,7.16 3.16,8.66 3.16,13.94 2.2,14.9 v2(2.2,16.6)
  Bottom Layer w0.3: v2(2.2,16.6) 2.05,16.75 2.05,22.545 2.255,22.75 U1.20
TDO: J12.5 U1.22 | length 21.3
  Bottom Layer w0.3: U1.22 1.841,23.75 1,22.909 1,14.055 2.205,12.85 4.418,12.85 5.3,11.968 5.3,8.78 J12.5@4.2,7.68
TMS: J12.6 U1.21 | length 16.7
  Top Layer w0.3: J12.6 2.66,9.75 2.66,13.44 v2(1.8,14.3)
  Bottom Layer w0.3: v2(1.8,14.3) 1.5,14.6 1.5,22.702 2.048,23.25 U1.21
TRST: J12.3 R48.1 U1.2 | length 20.5
  Top Layer w0.3: J12.3 4.895,4.94 6.005,6.05 6.95,6.05 7.3,6.4 8.793,6.4 10.75,8.357 10.75,13.147 10.4,13.497 10.4,14 11.45,15.05 v2(12.4,15.05)
  Bottom Layer w0.3: U1.2 9.7,16.893 9.993,16.6 10.452,16.6 11.302,15.75 11.795,15.75 12.4,15.145 v2(12.4,15.05)
TX: U1.1 U6.4 | length 15
  Top Layer w0.3: U6.4 13.999,9.7 14.099,9.6 15.097,9.6 15.8,10.303 15.8,11.297 14.497,12.6 v2(13,12.6)
  Bottom Layer w0.3: U1.1 10.552,17.7 12.502,15.75 12.995,15.75 13.3,15.445 13.3,12.9 v2(13,12.6)
VA_FB: C16.2 R11.1 R14.2 U1.7 U3.4 | length 36
  Top Layer w0.3: v2(8.8,15) 8.8,14.34 8.55,14.09 8.55,12.15 8.8,11.9 U3.4@9.4,11.9
  Bottom Layer w0.3: U1.7 7.2,16.598 7.698,16.1 7.845,16.1 8.8,15.145 v2(8.8,15) ; v2(9.4,11.7) 7.7,11.7 6.8,10.8 6.8,10.11 7,9.91 7,9.21 10.31,5.9 23.962,5.9 24.962,6.9 27.05,6.9 R14.2 R11.1
VB_FB: C17.2 R12.1 R15.2 U1.8 U3.3 | length 33.9
  Top Layer w0.3: U3.3 7.19,11.7 8.2,10.69 8.2,10 v2(7.7,9.5) ; U3.3@7,11.9 7.7,11.9 7.85,12.05 7.85,12.7 7.85,14.295 7.6,14.545 v2(7.6,15)
  Bottom Layer w0.3: U1.8 6.7,16.045 7.6,15.145 v2(7.6,15) ; v2(7.7,9.5) 7.9,9.3 7.9,9.017 10.517,6.4 23.755,6.4 25.855,8.5 27.05,8.5 R15.2 R12.1
VC_FB: C18.2 R13.1 R16.2 U1.10 U3.1 | length 34.6
  Top Layer w0.3: v2(6.4,15) 7,14.4 U3.1@7,13.8 ; U3.1 6.81,13.6 6.1,12.89 6.1,10.9 6.6,10.4 v2(7.5,10.4)
  Bottom Layer w0.3: U1.10 5.7,16.338 6.4,15.638 v2(6.4,15) ; v2(7.5,10.4) 7.9,10.4 8.4,9.9 8.4,9.224 10.724,6.9 23.548,6.9 25.1,8.452 25.1,9.345 25.855,10.1 27.05,10.1 R16.2 R13.1
Y: J13.6 R47.2 U6.6 | length 8.3
  Top Layer w0.3: J13.6 15.75,4.044 16.9,5.194 U6.6
Z: J13.5 R47.1 U6.7 | length 7.3
  Top Layer w0.3: U6.7 17.682,9.7 17.975,9.407 17.975,8.075 18.25,7.8 17.4,6.95 17.4,4.28 J13.5
pads on no net: C39.0 C40.0 J12.drill J13.drill U1.5 U1.9 U1.14 U1.16 U1.17 U1.45 U1.46 U2.1 U2.2 U2.3 U2.4 U2.50 U2.51 U2.52 U2.53 U2.54 U2.56

## Polygon pours and split planes (outlines as drawn)
BAT_GND on Bottom Layer "Top Layer-No Net" (solid, remove dead copper, pour order 22): 35.4,6.5 35.4,0.5 49.8,0.5 49.8,6.5
GND on Bottom Layer "Top Layer-No Net" (solid, remove dead copper, pour order 19): 24.5,15.2 31.5,15.2 31.5,5.5 35,5.5 35,0.2 24.5,0.2
GND on Bottom Layer "MCU GND Bottom" (solid, remove dead copper, pour order 29): 0.2,0.2 23.5,0.2 23.5,34.8 0.2,34.8
SL_A on Bottom Layer "Top Layer-No Net" (solid, remove dead copper, pour order 33): 36.7,28.3 32.6,28.3 32.6,32.8 36.7,32.8
SL_B on Bottom Layer "Top Layer-No Net" (solid, remove dead copper, pour order 34): 36.7,21.6 36.7,26.4 32.6,26.4 32.6,21.6 34.7,21.6
SL_C on Bottom Layer "Top Layer-No Net" (solid, remove dead copper, pour order 35): 36.7,15.3 32.6,15.3 32.6,20.1 36.7,20.1 36.7,20
SH_C on Bottom Layer "Top Layer-No Net" (solid, remove dead copper, pour order 21): 39.2,13.5 49.8,13.5 49.8,20.4 39.2,20.4
SH_B on Bottom Layer "Top Layer-No Net" (solid, remove dead copper, pour order 23): 39.2,20.6 39.2,27.4 49.8,27.4 49.8,20.6
SH_A on Bottom Layer "Top Layer-No Net" (solid, remove dead copper, pour order 26): 49.8,27.6 49.8,34.5 39.2,34.5 39.2,27.6
16V on Bottom Layer "Top Layer-No Net" (solid, remove dead copper, pour order 32): 39,13 39,7 49.8,7 49.8,13
16V on Top Layer "Power 16V" (solid, remove dead copper, pour order 27): 32,8.5 33.5,7 50,7 50,13 39,13 39,34.8 32,34.8
SH_C on Top Layer "Top Layer-No Net" (solid, remove dead copper, pour order 28): 49.8,13.5 49.8,20.4 39.2,20.4 39.2,13.5
GND on Top Layer "Power GND" (solid, remove dead copper, pour order 25): 31.5,34.8 31.5,7.5 33.5,5.5 35,5.5 35,0.2 24.5,0.2 24.5,34.8
16V on Top Layer "Driver 16V" (solid, remove dead copper, pour order 24): 19.933,20.5 18.44,20.5 17.8,18.9 17.8,17.843 19.2,16.7 19.8,16.7 20.5,16.7 20.5,18.8
SH_B on Top Layer "Top Layer-No Net" (solid, remove dead copper, pour order 30): 49.8,20.6 39.2,20.6 39.2,27.4 49.8,27.4
SH_A on Top Layer "Top Layer-No Net" (solid, remove dead copper, pour order 31): 49.8,27.6 49.8,34.5 39.2,34.5 39.2,27.6
GND on Top Layer "MCU GND Top" (solid, remove dead copper, pour order 36): 0.2,0.2 0.2,34.8 23.5,34.8 23.5,0.2
BAT_GND on Top Layer "Top Layer-No Net" (solid, remove dead copper, pour order 20): 49.8,6.5 49.8,0.5 35.4,0.5 35.4,6.5

## Keep-outs
Keep-Out Layer:
  lines w0.2: 48.49,32.5 cw(c48.99,32.5) 48.99,33 49,33 50,33 50,35 0,35 0,0 50,0 50,1.495 49,1.49 cw(c49,2) 48.49,2 44,1.99 cw(c44,2.5) 43.49,2.5 43.49,4.5 cw(c43.99,4.5) 43.99,5 48.49,5 cw(c48.99,5) 48.99,5.5 49,5.5 50,5.5 50,7.995 48.902,8.01 cw(c48.902,8.422) 48.49,8.422 48.49,8.5 44,8.49 cw(c44,9) 43.49,9 43.49,11 cw(c43.99,11) 43.99,11.5 48.49,11.5 cw(c48.99,11.5) 48.99,12 49,12 50,12 50,14.995 49,14.99 cw(c49,15.5) 48.49,15.5 44,15.49 cw(c44,16) 43.49,16 43.49,18 cw(c43.99,18) 43.99,18.5 48.49,18.5 cw(c48.99,18.5) 48.99,19 49,19 50,19 50,21.995 49,21.99 cw(c49,22.5) 48.49,22.5 44,22.49 cw(c44,23) 43.49,23 43.49,25 cw(c43.99,25) 43.99,25.5 48.49,25.5 cw(c48.99,25.5) 48.99,26 50,26 ; 48.49,32.5 ccw(c48.49,32.5) 48.49,32.5 ; 48.49,32.5 43.99,32.5 ccw(c43.99,32) 43.49,32 43.49,30 ccw(c44,30) 44,29.49 48.49,29.5 ccw(c49,29.5) 49,28.99 49.995,28.99 ccw(c49.995,28.995) 50,28.995 50,26 ; 50,26 ccw(c50,26) 50,26

## Silkscreen, mask and mechanical layers (free items; w line width, h text height)
Top Overlay:
  region: 0.2,13.203 0.2,18.8 5.8,18.8 5.8,13.203
  text "v0.3" at 32.7,10.8 h1.6
  text "+" at 37.3,8.7 h1.6
Bottom Paste:
  region: 14.15,23.85 16.95,23.85 16.95,30.25 14.15,30.25
Bottom Solder:
  region: 14.157,23.85 16.95,23.85 16.95,30.25 14.157,30.25